# EAGLE board CT_schematic (EAGLE 7.6.0)

Size 100 x 80 mm. Coordinates in mm from the lower left corner, seen from the top.
Outline: 0,0 100,0 100,80 0,80 0,0
Copper layers (1*16): Top 0.035mm / dielectric 1.5mm / Bottom 0.035mm
Design rules "default": minimum track width 10mil, minimum drill 24mil, track to track 8mil, track to pad 8mil, pad to pad 8mil, via to via 8mil, smd to smd 8mil, copper to edge 40mil, drill to drill 8mil, minimum pad ring 10mil, minimum via ring 8mil, stop-mask expansion 4mil, vias tented up to drill 0mil, thermal gap 10mil

## Footprints (pad centres in the part's own frame; a part is rotated, then mirrored left to right if it is on the bottom)
C0603 = smd 0.8 x 0.8: 1 -0.762,0; 2 0.762,0
C0402 = smd 0.5 x 0.5: 1 -0.508,0; 2 0.508,0
C0805 = smd 1.2 x 1.3: 1 -1.016,0; 2 1.016,0
EXV-9H = smd 3.505 x 1.676: 1 -2.857,0; 2 2.857,0
L0603 = smd 0.8 x 0.8: 1 -0.762,0; 2 0.762,0
DR1040 = smd 1.6 x 3.2: 1 -4.458,0; 2 4.458,0
PJ-037B_PACKAGE = drill 3.7 square: 1 12,0 | drill 3.2 square: 2 6,0
R0603 = smd 0.8 x 0.8: 1 -0.762,0; 2 0.762,0
LQFP144 = smd 0.35 x 1.35: 1 -8.75,-10.625; 2 -8.25,-10.625; 3 -7.75,-10.625; 4 -7.25,-10.625; 5 -6.75,-10.625; 6 -6.25,-10.625; 7 -5.75,-10.625; 8 -5.25,-10.625; 9 -4.75,-10.625; 10 -4.25,-10.625; 11 -3.75,-10.625; 12 -3.25,-10.625; 13 -2.75,-10.62; 14 -2.25,-10.625; 15 -1.75,-10.625; 16 -1.25,-10.625; 17 -0.75,-10.625; 18 -0.25,-10.625; 19 0.25,-10.625; 20 0.75,-10.625; 21 1.25,-10.625; 22 1.75,-10.625; 23 2.25,-10.625; 24 2.75,-10.62; 25 3.25,-10.625; 26 3.75,-10.625; 27 4.25,-10.625; 28 4.75,-10.625; 29 5.25,-10.625; 30 5.75,-10.625; 31 6.25,-10.625; 32 6.75,-10.625; 33 7.25,-10.625; 34 7.75,-10.625; 35 8.25,-10.625; 36 8.75,-10.625; 73 8.75,10.625; 74 8.25,10.625; 75 7.75,10.625; 76 7.25,10.625; 77 6.75,10.625; 78 6.25,10.625; 79 5.75,10.625; 80 5.25,10.625; 81 4.75,10.625; 82 4.25,10.625; 83 3.75,10.625; 84 3.25,10.625; 85 2.75,10.625; 86 2.25,10.625; 87 1.75,10.625; 88 1.25,10.625; 89 0.75,10.625; 90 0.25,10.625; 91 -0.25,10.625; 92 -0.75,10.625; 93 -1.25,10.625; 94 -1.75,10.625; 95 -2.25,10.625; 96 -2.75,10.625; 97 -3.25,10.625; 98 -3.75,10.625; 99 -4.25,10.625; 100 -4.75,10.625; 101 -5.25,10.625; 102 -5.75,10.625; 103 -6.25,10.625; 104 -6.75,10.625; 105 -7.25,10.625; 106 -7.75,10.625; 107 -8.25,10.625; 108 -8.75,10.625 | smd 1.35 x 0.35: 37 10.625,-8.75; 38 10.625,-8.25; 39 10.625,-7.75; 40 10.625,-7.25; 41 10.625,-6.75; 42 10.625,-6.25; 43 10.625,-5.75; 44 10.625,-5.25; 45 10.625,-4.75; 46 10.625,-4.25; 47 10.625,-3.75; 48 10.625,-3.25; 49 10.625,-2.75; 50 10.625,-2.25; 51 10.625,-1.75; 52 10.625,-1.25; 53 10.625,-0.75; 54 10.625,-0.25; 55 10.625,0.25; 56 10.625,0.75; 57 10.625,1.25; 58 10.625,1.75; 59 10.625,2.25; 60 10.625,2.75; 61 10.625,3.25; 62 10.625,3.75; 63 10.625,4.25; 64 10.625,4.75; 65 10.625,5.25; 66 10.625,5.75; 67 10.625,6.25; 68 10.625,6.75; 69 10.625,7.25; 70 10.625,7.75; 71 10.625,8.25; 72 10.625,8.75; 109 -10.625,8.75; 110 -10.625,8.25; 111 -10.625,7.75; 112 -10.625,7.25; 113 -10.625,6.75; 114 -10.625,6.25; 115 -10.625,5.75; 116 -10.625,5.25; 117 -10.625,4.75; 118 -10.625,4.25; 119 -10.625,3.75; 120 -10.625,3.25; 121 -10.625,2.75; 122 -10.625,2.25; 123 -10.625,1.75; 124 -10.625,1.25; 125 -10.625,0.75; 126 -10.625,0.25; 127 -10.625,-0.25; 128 -10.625,-0.75; 129 -10.625,-1.25; 130 -10.625,-1.75; 131 -10.625,-2.25; 132 -10.625,-2.75; 133 -10.625,-3.25; 134 -10.625,-3.75; 135 -10.625,-4.25; 136 -10.625,-4.75; 137 -10.625,-5.25; 138 -10.625,-5.75; 139 -10.625,-6.25; 140 -10.625,-6.75; 141 -10.625,-7.25; 142 -10.625,-7.75; 143 -10.625,-8.25; 144 -10.625,-8.75
SOIC-8 = smd 1.6 x 0.6: 1 -2.7,1.905 | smd 1.55 x 0.6: 2 -2.7,0.635; 3 -2.7,-0.635; 4 -2.7,-1.905; 5 2.7,-1.905; 6 2.7,-0.635; 7 2.7,0.635; 8 2.7,1.905
SAMTEC_FTSH-105-01-L-DV-K = smd 0.762 x 2.794: 1 -2.54,-2.032; 2 -2.54,2.032; 3 -1.27,-2.032; 4 -1.27,2.032; 5 0,-2.032; 6 0,2.032; 7 1.27,-2.032; 8 1.27,2.032; 9 2.54,-2.032; 10 2.54,2.032
TFBGA-153 = smd 0.3 x 0.3: A1 -3.25,3.25; A2 -2.75,3.25; A3 -2.25,3.25; A4 -1.75,3.25; A5 -1.25,3.25; A6 -0.75,3.25; A7 -0.25,3.25; A8 0.25,3.25; A9 0.75,3.25; A10 1.25,3.25; A11 1.75,3.25; A12 2.25,3.25; A13 2.75,3.25; A14 3.25,3.25; B1 -3.25,2.75; B2 -2.75,2.75; B3 -2.25,2.75; B4 -1.75,2.75; B5 -1.25,2.75; B6 -0.75,2.75; B7 -0.25,2.75; B8 0.25,2.75; B9 0.75,2.75; B10 1.25,2.75; B11 1.75,2.75; B12 2.25,2.75; B13 2.75,2.75; B14 3.25,2.75; C1 -3.25,2.25; C2 -2.75,2.25; C3 -2.25,2.25; C4 -1.75,2.25; C5 -1.25,2.25; C6 -0.75,2.25; C7 -0.25,2.25; C8 0.25,2.25; C9 0.75,2.25; C10 1.25,2.25; C11 1.75,2.25; C12 2.25,2.25; C13 2.75,2.25; C14 3.25,2.25; D1 -3.25,1.75; D2 -2.75,1.75; D3 -2.25,1.75; D4 -1.75,1.75; D12 2.25,1.75; D13 2.75,1.75; D14 3.25,1.75; E1 -3.25,1.25; E2 -2.75,1.25; E3 -2.25,1.25; E5 -1.25,1.25; E6 -0.75,1.25; E7 -0.25,1.25; E8 0.25,1.25; E9 0.75,1.25; E10 1.25,1.25; E12 2.25,1.25; E13 2.75,1.25; E14 3.25,1.25; F1 -3.25,0.75; F2 -2.75,0.75; F3 -2.25,0.75; F5 -1.25,0.75; F10 1.25,0.75; F12 2.25,0.75; F13 2.75,0.75; F14 3.25,0.75; G1 -3.25,0.25; G2 -2.75,0.25; G3 -2.25,0.25; G5 -1.25,0.25; G10 1.25,0.25; G12 2.25,0.25; G13 2.75,0.25; G14 3.25,0.25; H1 -3.25,-0.25; H2 -2.75,-0.25; H3 -2.25,-0.25; H5 -1.25,-0.25; H10 1.25,-0.25; H12 2.25,-0.25; H13 2.75,-0.25; H14 3.25,-0.25; J1 -3.25,-0.75; J2 -2.75,-0.75; J3 -2.25,-0.75; J5 -1.25,-0.75; J10 1.25,-0.75; J12 2.25,-0.75; J13 2.75,-0.75; J14 3.25,-0.75; K1 -3.25,-1.25; K2 -2.75,-1.25; K3 -2.25,-1.25; K5 -1.25,-1.25; K6 -0.75,-1.25; K7 -0.25,-1.25; K8 0.25,-1.25; K9 0.75,-1.25; K10 1.25,-1.25; K12 2.25,-1.25; K13 2.75,-1.25; K14 3.25,-1.25; L1 -3.25,-1.75; L2 -2.75,-1.75; L3 -2.25,-1.75; L12 2.25,-1.75; L13 2.75,-1.75; L14 3.25,-1.75; M1 -3.25,-2.25; M2 -2.75,-2.25; M3 -2.25,-2.25; M4 -1.75,-2.25; M5 -1.25,-2.25; M6 -0.75,-2.25; M7 -0.25,-2.25; M8 0.25,-2.25; M9 0.75,-2.25; M10 1.25,-2.25; M11 1.75,-2.25; M12 2.25,-2.25; M13 2.75,-2.25; M14 3.25,-2.25; N1 -3.25,-2.75; N2 -2.75,-2.75; N3 -2.25,-2.75; N4 -1.75,-2.75; N5 -1.25,-2.75; N6 -0.75,-2.75; N7 -0.25,-2.75; N8 0.25,-2.75; N9 0.75,-2.75; N10 1.25,-2.75; N11 1.75,-2.75; N12 2.25,-2.75; N13 2.75,-2.75; N14 3.25,-2.75; P1 -3.25,-3.25; P2 -2.75,-3.25; P3 -2.25,-3.25; P4 -1.75,-3.25; P5 -1.25,-3.25; P6 -0.75,-3.25; P7 -0.25,-3.25; P8 0.25,-3.25; P9 0.75,-3.25; P10 1.25,-3.25; P11 1.75,-3.25; P12 2.25,-3.25; P13 2.75,-3.25; P14 3.25,-3.25
RFM75-S = smd 0.85 x 1.6: 1 1.7,0.8; 2 2.97,0.8; 3 4.24,0.8; 4 5.51,0.8; 5 6.78,0.8; 6 8.05,0.8; 7 9.32,0.8; 8 10.59,0.8
WNG008 = smd 0.45 x 0.55: 1 -1.27,0; 2 0,0; 3 1.27,0; 4 2.54,0; 5 2.54,7.5; 6 1.27,7.5; 7 0,7.5; 8 -1.27,7.53 | smd 4.9 x 4.75: PAD 0.635,3.75
ABLS-25.000MHZ-B2F-T = smd 5.6 x 2.8: 1 -3.81,0; 2 5.69,0
ASEK = smd 1.4 x 1: 1 -1.1,-0.8; 2 1.1,-0.8; 3 1.1,0.8; 4 -1.1,0.8
TSOT-23-5 = smd 1.3 x 0.62: 1 -1.31,0.95; 2 -1.31,0; 3 -1.31,-0.95; 4 1.31,-0.95; 5 1.31,0.95
SON-6 = smd 0.55 x 0.3: 1 -0.355,0.5 | smd 0.52 x 0.3: 2 -0.37,0; 3 -0.37,-0.5; 4 0.37,-0.5; 5 0.37,0; 6 0.37,0.5
SW_4-1437565-2 = smd 1.4 x 2.1: 1 -2.23,4.55; 2 -2.23,-4.55; 3 2.23,4.55; 4 2.23,-4.55
LGM67K-G1J2-24-Z = smd 0.8 x 1.4: A -2,0; C 0,0
NC7SZ125M5X = smd 1.3 x 0.7: 1 -1.3,0.95; 2 -1.3,0; 3 -1.3,-0.95; 4 1.3,-0.95; 5 1.3,0.95

## Placement (x,y rotation side)
C1  1e-06  [C0603]  -38.1,78.74 0 top  (outside the outline)
C2  1e-07  [C0603]  -41.91,78.74 0 top  (outside the outline)
C3  1e-07  [C0603]  -45.72,78.74 0 top  (outside the outline)
C4  1e-07  [C0603]  -49.53,78.74 0 top  (outside the outline)
C5  1e-07  [C0603]  -53.34,78.74 0 top  (outside the outline)
C6  1e-07  [C0603]  -57.15,78.74 0 top  (outside the outline)
C7  1e-07  [C0603]  -60.96,78.74 0 top  (outside the outline)
C8  1e-07  [C0603]  -64.77,78.74 0 top  (outside the outline)
C9  1e-07  [C0603]  -68.58,78.74 0 top  (outside the outline)
C10  1e-07  [C0603]  -72.39,78.74 0 top  (outside the outline)
C11  1e-07  [C0603]  -76.2,78.74 0 top  (outside the outline)
C12  1e-07  [C0603]  -80.01,78.74 0 top  (outside the outline)
C13  1e-07  [C0603]  -15.24,83.82 0 top  (outside the outline)
C14  4.7e-06  [C0603]  -15.24,78.74 0 top  (outside the outline)
C15  1e-07  [C0603]  -19.05,83.82 0 top  (outside the outline)
C16  2.2e-06  [C0603]  -19.05,78.74 0 top  (outside the outline)
C17  2.2e-06  [C0603]  -22.86,78.74 0 top  (outside the outline)
C18  1e-08  [C0603]  -22.86,83.82 0 top  (outside the outline)
C19  1e-06  [C0603]  -26.67,83.82 0 top  (outside the outline)
C20  1e-07  [C0603]  -30.48,83.82 0 top  (outside the outline)
C21  1e-11  [C0402]  -60.96,83.82 0 top  (outside the outline)
C22  1e-11  [C0402]  -64.77,83.82 0 top  (outside the outline)
C23  1e-08  [C0402]  -68.58,83.82 0 top  (outside the outline)
C24  1e-08  [C0402]  -72.39,83.82 0 top  (outside the outline)
C25  1e-07  [C0402]  -76.2,83.82 0 top  (outside the outline)
C26  1e-07  [C0402]  -80.01,83.82 0 top  (outside the outline)
C27  2.2e-06  [C0603]  -26.67,78.74 0 top  (outside the outline)
C28  2.2e-06  [C0603]  -30.48,78.74 0 top  (outside the outline)
C29  1e-07  [C0402]  -15.24,88.9 0 top  (outside the outline)
C30  1e-07  [C0402]  -19.05,88.9 0 top  (outside the outline)
C31  2.2e-06  [C0603]  -34.29,78.74 0 top  (outside the outline)
C32  1e-07  [C0402]  -22.86,88.9 0 top  (outside the outline)
C33  1e-06  [C0603]  -34.29,83.82 0 top  (outside the outline)
C34  1e-08  [C0402]  -26.67,88.9 0 top  (outside the outline)
C35  1e-08  [C0402]  -30.48,88.9 0 top  (outside the outline)
C36  1e-05  [C0805]  -48.26,60.96 0 top  (outside the outline)
C37  1e-05  [C0805]  -53.34,60.96 0 top  (outside the outline)
C38  1e-07  [C0402]  -34.29,88.9 0 top  (outside the outline)
C39  0.0001  [EXV-9H]  -38.1,54.61 0 top  (outside the outline)
C40  0.0001  [EXV-9H]  -49.53,54.61 0 top  (outside the outline)
C41  1e-08  [C0402]  -38.1,88.9 0 top  (outside the outline)
C42  1e-08  [C0402]  -41.91,88.9 0 top  (outside the outline)
C43  1e-08  [C0402]  -45.72,88.9 0 top  (outside the outline)
F1  240.0  [L0603]  -38.1,83.82 0 top  (outside the outline)
I1  5.2e-06  [DR1040]  -19.05,44.45 0 top  (outside the outline)
J1  PJ-037B  [PJ-037B_PACKAGE]  -57.15,30.48 0 top  (outside the outline)
R2  1000.0  [R0603]  -41.91,83.82 0 top  (outside the outline)
R4  4700.0  [R0603]  -45.72,83.82 0 top  (outside the outline)
R5  4700.0  [R0603]  -49.53,83.82 0 top  (outside the outline)
R6  10000.0  [R0603]  -15.24,68.58 0 top  (outside the outline)
R7  10000.0  [R0603]  -20.32,68.58 0 top  (outside the outline)
R8  10000.0  [R0603]  -25.4,68.58 0 top  (outside the outline)
R9  10000.0  [R0603]  -30.48,68.58 0 top  (outside the outline)
R10  10000.0  [R0603]  -35.56,68.58 0 top  (outside the outline)
R11  10000.0  [R0603]  -40.64,68.58 0 top  (outside the outline)
R12  10000.0  [R0603]  -45.72,68.58 0 top  (outside the outline)
R13  10000.0  [R0603]  -50.8,68.58 0 top  (outside the outline)
R14  10000.0  [R0603]  -55.88,68.58 0 top  (outside the outline)
R15  10000.0  [R0603]  -60.96,68.58 0 top  (outside the outline)
R16  10000.0  [R0603]  -66.04,68.58 0 top  (outside the outline)
R17  5.0  [R0603]  -53.34,83.82 0 top  (outside the outline)
R18  34000.0  [R0603]  -71.12,68.58 0 top  (outside the outline)
R19  34000.0  [R0603]  -76.2,68.58 0 top  (outside the outline)
R20  34000.0  [R0603]  -81.28,68.58 0 top  (outside the outline)
R21  34000.0  [R0603]  -15.24,73.66 0 top  (outside the outline)
R22  34000.0  [R0603]  -20.32,73.66 0 top  (outside the outline)
R23  34000.0  [R0603]  -25.4,73.66 0 top  (outside the outline)
R24  34000.0  [R0603]  -30.48,73.66 0 top  (outside the outline)
R25  34000.0  [R0603]  -35.56,73.66 0 top  (outside the outline)
R26  34000.0  [R0603]  -40.64,73.66 0 top  (outside the outline)
R27  34000.0  [R0603]  -45.72,73.66 0 top  (outside the outline)
R28  10000.0  [R0603]  -50.8,73.66 0 top  (outside the outline)
R29  10000.0  [R0603]  -55.88,73.66 0 top  (outside the outline)
R30  10000.0  [R0603]  -60.96,73.66 0 top  (outside the outline)
R31  10000.0  [R0603]  -66.04,73.66 0 top  (outside the outline)
R32  10000.0  [R0603]  -71.12,73.66 0 top  (outside the outline)
R33  220000.0  [R0603]  -71.12,60.96 0 top  (outside the outline)
R34  1000000.0  [R0603]  -66.04,60.96 0 top  (outside the outline)
R35  10000.0  [R0603]  -76.2,73.66 0 top  (outside the outline)
R36  10000.0  [R0603]  -81.28,73.66 0 top  (outside the outline)
R37  9100.0  [R0603]  -57.15,83.82 0 top  (outside the outline)
R38  680000.0  [R0603]  -76.2,60.96 0 top  (outside the outline)
R39  120000.0  [R0603]  -81.28,60.96 0 top  (outside the outline)
U1  STM32F767ZGT6  [LQFP144]  -24.13,11.43 0 top  (outside the outline)
U2  AT25010B-SSHL-T  [SOIC-8]  -54.61,43.18 0 top  (outside the outline)
U3  AT25M02-SSHD-T  [SOIC-8]  -71.12,43.18 0 top  (outside the outline)
U4  FTSH-105-01-L-DV-K  [SAMTEC_FTSH-105-01-L-DV-K]  -35.56,31.75 0 top  (outside the outline)
U5  mtfc4gmcdm  [TFBGA-153]  -58.42,8.89 0 top  (outside the outline)
U6  RFM75-S  [RFM75-S]  -49.53,3.81 0 top  (outside the outline)
U7  S25FL128SDPNFI001  [WNG008]  -40.64,41.91 0 top  (outside the outline)
U8  ABLS-25.000MHZ-B2F-T  [ABLS-25.000MHZ-B2F-T]  -68.58,54.61 0 top  (outside the outline)
U9  ASEK-32.768KHz-ECST  [ASEK]  -29.21,54.61 0 top  (outside the outline)
U10  ltc3406es5  [TSOT-23-5]  -58.42,60.96 0 top  (outside the outline)
U11  TPS3895ADRYR  [SON-6]  -48.26,87.63 0 top  (outside the outline)
U12  4-1437565-2  [SW_4-1437565-2]  -73.66,29.21 0 top  (outside the outline)
U13  Q65110A2395  [LGM67K-G1J2-24-Z]  -17.78,62.23 0 top  (outside the outline)
U14  nc7sz125m5x  [NC7SZ125M5X]  -29.21,60.96 0 top  (outside the outline)
U15  nc7sz125m5x  [NC7SZ125M5X]  -35.56,60.96 0 top  (outside the outline)
U16  nc7sz125m5x  [NC7SZ125M5X]  -41.91,60.96 0 top  (outside the outline)

## Library data of the parts
C1-C43 F1 I1 J1 R2 R4-R39 U1-U16 = circuit_tree

## Nets
CLK_CRYSTAL_U1_23: C21.1 U1.23 U8.1
CLK_CRYSTAL_U1_24: C22.1 U1.24 U8.2
CLK_U1_8: U1.8 U9.3
GND: C1.2 C2.2 C3.2 C4.2 C5.2 C6.2 C7.2 C8.2 C9.2 C10.2 C11.2 C12.2 C13.2 C14.2 C15.2 C16.2 C17.2 C18.2 C19.2 C20.2 C21.2 C22.2 C23.2 C24.2 C25.2 C26.2 C27.2 C28.2 C29.2 C30.2 C31.2 C32.2 C33.2 C34.2 C35.2 C36.2 C37.1 C37.2 C38.2 C39.2 C40.2 C41.2 C42.2 C43.2 J1.2 R2.2 R6.2 R17.2 R33.2 R37.2 R39.2 U1.16 U1.31 U1.38 U1.51 U1.61 U1.83 U1.94 U1.107 U1.120 U1.130 U2.4 U3.4 U4.3 U4.5 U5.C4 U5.E7 U5.G5 U5.H10 U5.K8 U5.N2 U5.N5 U5.P4 U5.P6 U6.1 U7.4 U7.PAD U9.2 U10.2 U11.2 U13.C U14.2 U14.3 U15.1 U15.3 U16.1 U16.3
NET_U1_25: R5.1 U1.25 U16.4
NET_U1_33: C18.1 C19.1 F1.1 U1.32 U1.33
NET_U1_71: C16.1 U1.71
NET_U1_106: C17.1 U1.106
NET_U1_138: R6.1 U1.138
NET_U1_141: U13.A
NET_U1_142: U12.3 U12.4
NET_U1_143: R7.1 U1.143
NET_U2_3: R8.1 U2.3
NET_U2_7: R10.1 U2.7
NET_U3_3: R11.1 U3.3
NET_U3_7: R13.1 U3.7
NET_U4_9: R17.1 U4.9
NET_U5_C2: C28.1 C29.1 U5.C2
NET_U5_K5: R4.1 U5.K5 U15.4
NET_U6_3: R28.1 U6.3
NET_U7_3: R30.1 U7.3
NET_U7_7: R32.1 U7.7
NET_U10_1: U10.1
NET_U10_3: I1.1 U10.3
NET_U10_5: R33.1 R34.1 U10.5
NET_U10_ATNET_3: I1.2 R34.2
NET_U11_1: R36.1 R37.1 U11.1
NET_U11_3: R38.2 R39.1 U11.3
NET_U11_4: R35.1 U11.4 U14.4 U15.2 U16.2
NET_U12_1: R2.1 U12.1 U12.2
PROC_SDMMC1_CK: R27.1 U1.113 U5.M6
PROC_SDMMC1_CMD: R26.1 U1.116 U5.M5
PROC_SDMMC1_D0: R18.1 U1.98 U5.A3
PROC_SDMMC1_D1: R19.1 U1.99 U5.A4
PROC_SDMMC1_D2: R20.1 U1.111 U5.A5
PROC_SDMMC1_D3: R21.1 U1.112 U5.B2
PROC_SDMMC1_D4: R22.1 U1.139 U5.B3
PROC_SDMMC1_D5: R23.1 U1.140 U5.B4
PROC_SDMMC1_D6: R24.1 U1.96 U5.B5
PROC_SDMMC1_D7: R25.1 U1.97 U5.B6
PROC_SPI1_MISO: U1.42 U6.7
PROC_SPI1_MOSI: U1.43 U6.6
PROC_SPI1_NSS: R29.1 U1.40 U6.4
PROC_SPI1_SCK: U1.41 U6.5
PROC_SPI2_MISO: U1.28 U3.2
PROC_SPI2_MOSI: U1.27 U3.5
PROC_SPI2_NSS: R12.1 U1.73 U3.1
PROC_SPI2_SCK: U1.69 U3.6
PROC_SPI4_MISO: U1.4 U7.2
PROC_SPI4_MOSI: U1.5 U7.5
PROC_SPI4_NSS: R31.1 U1.3 U7.1
PROC_SPI4_SCK: U1.1 U7.6
PROC_SPI5_MISO: U1.20 U2.2
PROC_SPI5_MOSI: U1.21 U2.5
PROC_SPI5_NSS: R9.1 U1.18 U2.1
PROC_SPI5_SCK: U1.19 U2.6
PROC_SYS_JTCK_SWCLK: R15.1 U1.109 U4.4
PROC_SYS_JTDO_SWO: U1.133 U4.6
PROC_SYS_JTMS_SWDIO: R16.1 U1.105 U4.2
RST_OUT_U4_JTAG_RST_B: R14.1 U4.10 U14.1
VCC_S1_5V4: C36.1 C39.1 C40.1 J1.1 U10.4
VCC_TIER1_3V3: C1.1 C2.1 C3.1 C4.1 C5.1 C6.1 C7.1 C8.1 C9.1 C10.1 C11.1 C12.1 C13.1 C14.1 C15.1 C20.1 C23.1 C24.1 C25.1 C26.1 C27.1 C30.1 C31.1 C32.1 C33.1 C34.1 C35.1 C37.2 C38.1 C41.1 C42.1 C43.1 F1.2 I1.2 R4.2 R5.2 R7.2 R8.2 R9.2 R10.2 R11.2 R12.2 R13.2 R14.2 R15.2 R16.2 R18.2 R19.2 R20.2 R21.2 R22.2 R23.2 R24.2 R25.2 R26.2 R27.2 R28.2 R29.2 R30.2 R31.2 R32.2 R34.2 R35.2 R36.2 R38.1 U1.6 U1.17 U1.30 U1.39 U1.52 U1.62 U1.72 U1.84 U1.95 U1.108 U1.121 U1.131 U1.144 U2.8 U3.8 U4.1 U5.C6 U5.E6 U5.F5 U5.J10 U5.K9 U5.M4 U5.N4 U5.P3 U5.P5 U6.2 U7.8 U9.4 U11.6 U14.5 U15.5 U16.5

## Tracks (layer width: path | path; a pad name or v marks a point on that pad's centre or on a via)
CLK_CRYSTAL_U1_23  (2 unrouted)
CLK_CRYSTAL_U1_24  (2 unrouted)
CLK_U1_8  (1 unrouted)
GND  (86 unrouted)
NET_U1_25  (2 unrouted)
NET_U1_33  (4 unrouted)
NET_U1_71  (1 unrouted)
NET_U1_106  (1 unrouted)
NET_U1_138  (1 unrouted)
NET_U1_142  (1 unrouted)
NET_U1_143  (1 unrouted)
NET_U2_3  (1 unrouted)
NET_U2_7  (1 unrouted)
NET_U3_3  (1 unrouted)
NET_U3_7  (1 unrouted)
NET_U4_9  (1 unrouted)
NET_U5_C2  (2 unrouted)
NET_U5_K5  (2 unrouted)
NET_U6_3  (1 unrouted)
NET_U7_3  (1 unrouted)
NET_U7_7  (1 unrouted)
NET_U10_3  (1 unrouted)
NET_U10_5  (2 unrouted)
NET_U10_ATNET_3  (1 unrouted)
NET_U11_1  (2 unrouted)
NET_U11_3  (2 unrouted)
NET_U11_4  (4 unrouted)
NET_U12_1  (2 unrouted)
PROC_SDMMC1_CK  (2 unrouted)
PROC_SDMMC1_CMD  (2 unrouted)
PROC_SDMMC1_D0  (2 unrouted)
PROC_SDMMC1_D1  (2 unrouted)
PROC_SDMMC1_D2  (2 unrouted)
PROC_SDMMC1_D3  (2 unrouted)
PROC_SDMMC1_D4  (2 unrouted)
PROC_SDMMC1_D5  (2 unrouted)
PROC_SDMMC1_D6  (2 unrouted)
PROC_SDMMC1_D7  (2 unrouted)
PROC_SPI1_MISO  (1 unrouted)
PROC_SPI1_MOSI  (1 unrouted)
PROC_SPI1_NSS  (2 unrouted)
PROC_SPI1_SCK  (1 unrouted)
PROC_SPI2_MISO  (1 unrouted)
PROC_SPI2_MOSI  (1 unrouted)
PROC_SPI2_NSS  (2 unrouted)
PROC_SPI2_SCK  (1 unrouted)
PROC_SPI4_MISO  (1 unrouted)
PROC_SPI4_MOSI  (1 unrouted)
PROC_SPI4_NSS  (2 unrouted)
PROC_SPI4_SCK  (1 unrouted)
PROC_SPI5_MISO  (1 unrouted)
PROC_SPI5_MOSI  (1 unrouted)
PROC_SPI5_NSS  (2 unrouted)
PROC_SPI5_SCK  (1 unrouted)
PROC_SYS_JTCK_SWCLK  (2 unrouted)
PROC_SYS_JTDO_SWO  (1 unrouted)
PROC_SYS_JTMS_SWDIO  (2 unrouted)
RST_OUT_U4_JTAG_RST_B  (2 unrouted)
VCC_S1_5V4  (4 unrouted)
VCC_TIER1_3V3  (96 unrouted)